# Altium PCB PCB.PcbDoc
Units mm, origin at the board's own origin, x right, y up, seen from the top; angles counter-clockwise.
Board outline 99.04 x 36.09 mm, 2 copper layers (Top Layer, Bottom Layer); 36 components, 25 nets, 101 pads, 18 vias.
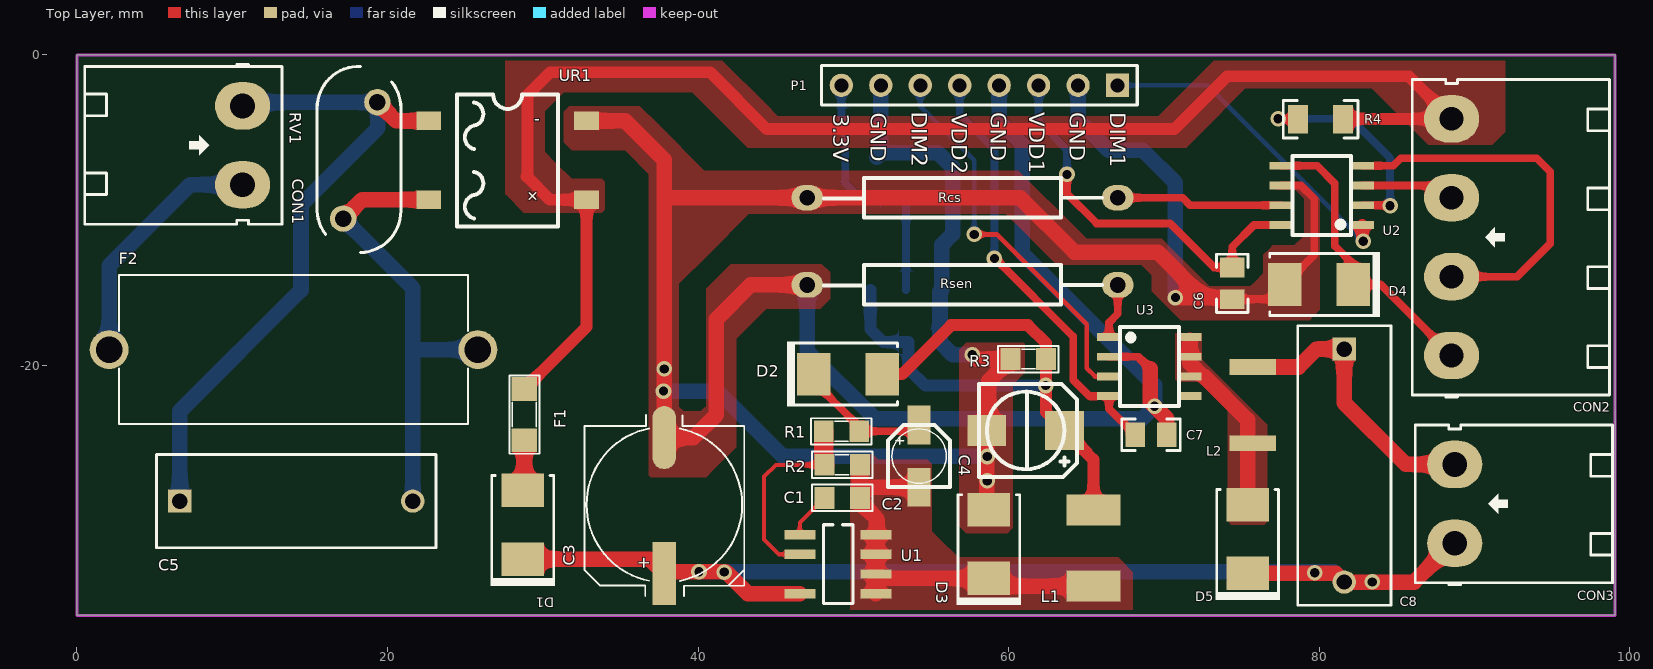
[diagram p0: Top Layer view]
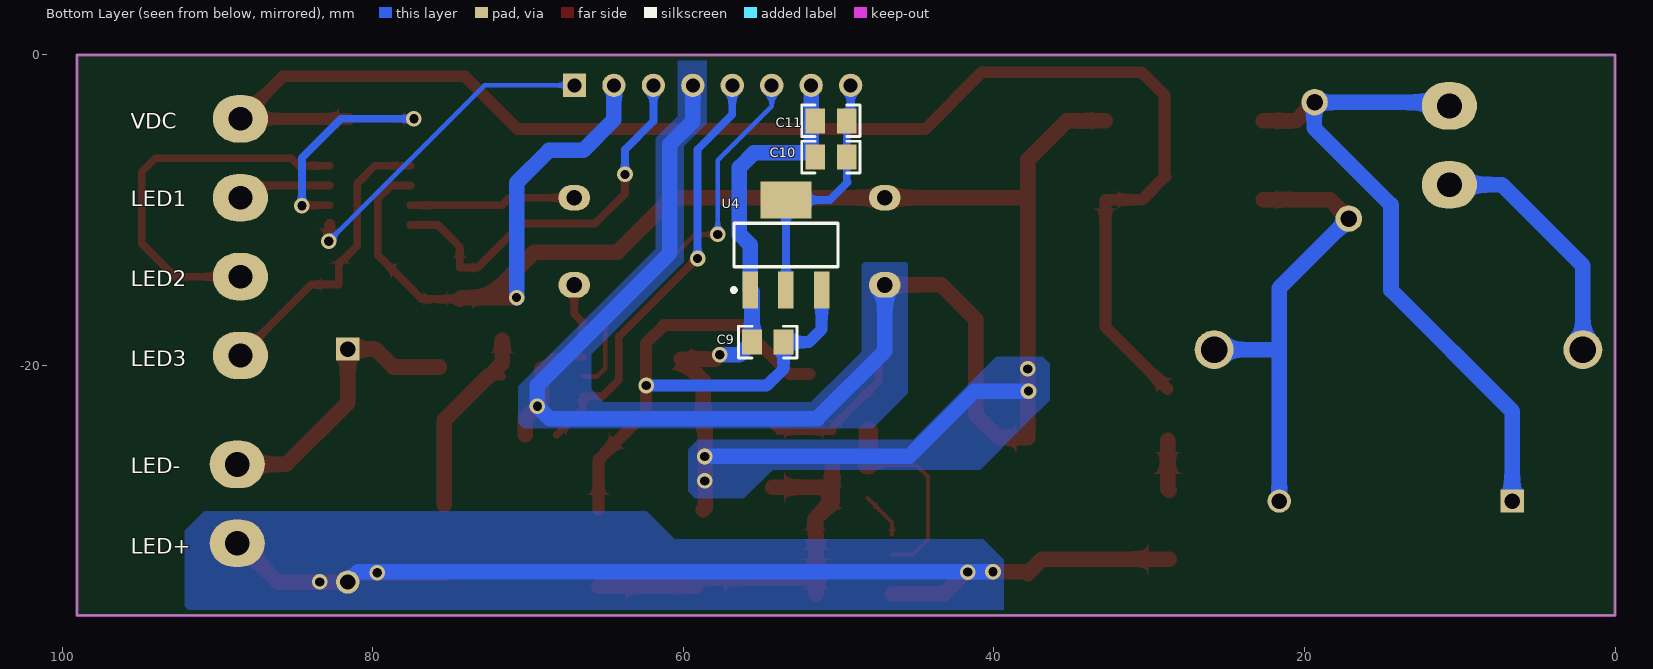
[diagram p1: Bottom Layer view, seen from below]

## Layer stack, top to bottom
Top Solder: solder mask 0.0102, Solder Resist, Dk 3.5
Top Layer: signal copper 0.0356
Dielectric 1: dielectric 0.32, FR-4, Dk 4.8
Bottom Layer: signal copper 0.0356
Bottom Solder: solder mask 0.0102, Solder Resist, Dk 3.5

## Board outline
0,-36.093 99.045,-36.093 99.045,0 0,0

## Design rules (kind name [scope] priority, off if disabled: settings)
Clearance [All] p1: gap=0.254
MinimumSolderMaskSliver [All] p1: minsoldermaskwidth=0
PolygonConnect [All] p1: connectstyle=Direct reliefconductorwidth=0.254 reliefentries=4 polygonreliefangle="90 Angle" airgapwidth=0.254
RoutingVias [All] p1: holewidth=0.4 width=0.7 viastyle="Through Hole" minholewidth=0.3 minwidth=0.6 maxholewidth=2 maxwidth=5
SilkToBoardRegionClearance [All] p1 off:
SilkToSolderMaskClearance [IsPad] p1: minsilkscreentomaskgap=0 clearancetoexposedcopper=TRUE
SolderMaskExpansion [All] p1: expansion=0.102
Width [All] p1: maxlimit=2.54 minlimit=0.254 preferedwidth=0.508
27 further rules are at their usual default settings.

## Components (designator, comment, footprint, x,y, rotation, side; value= is the part's Value field where it differs from the comment)
C1 "104" 0805_Cap 49.276,-28.524 r180 top
C2 "10uF" TU_NHOM_10uF_MH 54.229,-25.832 r180 top
C3 "400AX6R8M8x11" CAP-PANACAP-G-GENERIC 37.821,-28.956 r90 top locked
C4 "220uF" TU_NHOM_2.5_MH 61.087,-24.181 r270 top
C5 "B32922C3334M189" B32922_12mm 14.122,-28.727 r0 top locked
C6 "104" 0805_HV 74.397,-14.707 r90 top
C7 "104" 0805_HV 69.164,-24.46 r180 top
C8 "B32922C3334M189" B32922_12mm 81.61,-26.441 r270 top locked
C9 "105" 0805_HV 54.559,-18.491 r180 bottom
C10 "105" 0805_HV 50.495,-6.579 r180 bottom
C11 "105" 0805_HV 50.495,-4.242 r180 bottom
CON1 "CON 2 EDG 5.08_MH" "CON 2 EDG 5.08" 10.668,-5.817 r270 top locked
CON2 "CON 4 EDG 5.08_MH" "Con 4 EDG 5.08" 88.519,-11.735 r90 top locked
CON3 "CON 2 EDG 5.08_MH" "CON 2 EDG 5.08" 88.722,-28.905 r90 top
D1 "US1M-13-F" SMB 28.702,-30.251 r270 top
D2 "US1M-13-F" SMB 49.657,-20.549 r180 top
D3 "US1M-13-F" SMB 58.725,-31.496 r270 top
D4 "US1M-13-F" SMB 79.984,-14.783 r0 top
D5 "US1M-13-F" SMB 75.387,-31.166 r270 top
F1 "FUSE_AUTO_0.5A 8V 1206_MH" "FUSE 1206" 28.78,-23.114 r270 top
F2 "37015000430" "Fuse 5x20" 13.945,-18.974 r180 top locked
L1 "680uF" "Inductor 4.5x5"#1 65.557,-32.004 r270 top
L2 "680uF" "Inductor 4.5x5"#2 75.817,-22.794 r270 top
P1 "Header 8" HDR1X8 67.005,-1.956 r180 top
R1 "13k" 0805_R 49.225,-24.232 r0 top
R2 "2K" 0805_R 49.276,-26.391 r180 top
R3 "3k3" 0805_R 61.265,-19.583 r0 top
R4 "2K" 1206 80.086,-4.14 r180 top
Rcs "TRO_CS_2W_MH" TRO_VACH_2W 57.023,-9.195 r0 top locked
Rsen "TRO_CS_2W_MH" TRO_VACH_2W 57.023,-14.808 r0 top locked
RV1 "S10K275E2" VAR_S10K275E2 18.161,-6.731 r270 top
U1 "LNK306" "SOP 7" 48.997,-32.791 r0 top
U2 "FL77905MX" "SOP 8" 80.162,-9.042 r90 top
U3 "HV9925SG" "SOP 8" 69.063,-20.066 r270 top
U4 "AMS1117-3.3V SOT223 _MH" SOT223 53.391,-12.238 r180 bottom locked
UR1 "DB207S" DB207S 27.737,-6.782 r270 top locked

## Footprints (in the part's own frame and the unit in brackets; to place one, negate y for a bottom-side part, rotate by r counter-clockwise, add the part's x,y. Pads: shape width x height; smd on the part's side, far side on the other; paste and mask are expansions set on the pad)
0805_Cap [mil]
  rect 50x55 smd: 1(-45,0) 2(45,0)
  silkscreen extent -77,-34 76,33, body extent -57,-25 53,25, height 32
0805_HV [mil] "0805 with 30mil clearance between pads"
  rect 50x63 smd: 1(-40,0) 2(40,0)
  silkscreen extent -74,-40 74,40, body extent -43,-29 43,29, height 57
0805_R [mil]
  rect 50x55 smd: 1(-45,0) 2(45,0)
  silkscreen extent -77,-34 76,33, body extent -45,-27 45,27, height 28
1206 [mm] "1206 from SM-752 data"
  rect 1.3x1.85 smd: 1(1.45,0) 2(-1.45,0)
  silkscreen extent -2.4,-1.21 2.4,1.21, body extent -1.7,-0.9 1.7,0.9, height 1.35
B32922_12mm [mm] "Epcos film capacitors, 15mm spacing"
  rect 1.5x1.5 hole 0.991: 1(-7.5,0)
  round 1.5 hole 0.991: 2(7.5,0)
  silkscreen extent -9,-3 9,3, body extent -9,-3 9,3, height 12
CAP-PANACAP-G-GENERIC [mil]
  rect 160x59.06 smd: 1(-175,0)
  oval 160x59.06 smd: 2(170,0)
  silkscreen extent -231,-203 227,203, body extent -233,-203 223,203, height 402
"CON 2 EDG 5.08" [mil]
  oval 120x140 hole 62.99: 1(-100,0) 2(100,0)
  silkscreen extent -205,-400 200,100, body extent -197,-399 197,73, height 334
"Con 4 EDG 5.08" [mil]
  oval 120x140 hole 60: 1(-300,0) 2(-100,0) 3(100,0) 4(300,0)
  silkscreen extent -405,-400 400,100, body extent -396,-402 397,70, height 334
DB207S [mm]
  rect 1.2x1.6 smd: 1(-2.54,-5.08) 2(2.54,-5.08) 3(2.54,5.08) 4(-2.54,5.08)
  silkscreen extent -4.25,-3.25 4.26,3.25, body extent -4.4,-4.98 4.4,4.98, height 3.02
"Fuse 5x20" [mm] "Epcos film capacitors, 15mm spacing"
  round 2.5 hole 1.7: 1(-11.875,0) 2(11.875,0)
  silkscreen extent -11.25,-4.8 11.25,4.8, body extent -12.14,-4.46 12.11,4.54, height 13.94
"FUSE 1206" [mil]
  rect 60x65 smd: 1(-63,0.94) 2(67,0.94)
  silkscreen extent -97,-37 101,40, body extent -63,-33 63,33, height 22
HDR1X8 [mm] "Connector; Header; 8 Position"
  rect 1.5x1.5 hole 0.9: 1(0,0)
  round 1.5 hole 0.9: 2(2.54,0) 3(5.08,0) 4(7.62,0) 5(10.16,0) 6(12.7,0) 7(15.24,0) 8(17.78,0)
  silkscreen extent -1.27,-1.27 19.05,1.27
"Inductor 4.5x5"#1 [mm]
  rect 2x3.5 smd: 1(2.2,-0.1) 2(-2.7,-0.1)
  body extent -2.6,-2.6 2.2,2.2, height 2
"Inductor 4.5x5"#2 [mm]
  rect 1x3 smd: 1(2.2,-0.1) 2(-2.7,-0.1)
  body extent -2.6,-2.6 2.2,2.2, height 2
SMB [mm] "Molded Diode, 2-Leads, Body 5.4x3.6mm, IPC Medium Density, based on OnSemi component dimensions"
  rect 2.159x2.743 smd: 1(2.21,0) 2(-2.21,0)
  silkscreen extent -3.18,-2.08 3.94,2.08, body extent -2.7,-1.8 2.7,1.8, height 2.32
"SOP 7" [mm]
  rect 2x0.6 smd: 1(-2.45,1.905) 2(-2.45,0.635) 4(-2.45,-1.905) 5(2.45,-1.905) 6(2.45,-0.635) 7(2.45,0.635) 8(2.45,1.905)
  silkscreen extent -0.93,-2.54 0.98,2.54, body extent -3.02,-2.42 3.02,2.48, height 1.36
"SOP 8" [mil] "LQFP64"
  rect 20x60 smd: 1(-75,-102.5) 2(-25,-102.5) 3(25,-102.5) 4(75,-102.5) 5(75,102.5) 6(25,102.5) 7(-25,102.5) 8(-75,102.5)
  silkscreen extent -100,-74 100,74, body extent -98,-120 100,117, height 63
SOT223 [mm]
  rect 1x2.4 smd: 1(-2.3,-2.9) 2(0,-2.9) 3(2.3,-2.9)
  rect 3.3x2.4 smd: 4(0,2.9)
  silkscreen extent -3.48,-3.02 3.35,1.4, body extent -3.25,-3.56 3.25,3.4, height 1.68
TRO_VACH_2W [mil]
  oval 80x65 hole 40: 1(-393.7,0) 2(393.7,0)
  silkscreen extent -351,-50 354,50, body extent -414,-110 414,107, height 217
TU_NHOM_2.5_MH [mm]
  rect 2.5x2.5 smd: 1(0,2.5)
  rect 2x2.5 smd: 2(0,-2.5)
  silkscreen extent -3,-3 3,3.3, body extent -3.3,-3.5 3.3,3.5, height 8.11
TU_NHOM_10uF_MH [mm]
  rect 1.5x2.5 smd: 1(0,-2) 2(0,2)
  silkscreen extent -2,-2 2,2, body extent -2.15,-2.5 2.15,2.5, height 5.4
VAR_S10K275E2 [mm] "EPCOS"
  round 1.7 hole 1.067: 1(3.81,-1.016) 2(-3.69,1.184)
  silkscreen extent -6,-2.7 6,2.7, body extent -5.98,-2.7 6.02,2.7, height 15

## Part data
C1 C6 C7 C9 C10 C11: library part CM, "Cap SMD"
C2: library part TU_NHOM_10uF_25V_MH, "TU_NHOM_10uF_25V_MH"
C3: "CAP, AL, 6.8uF, 400V, +/-20%, TH"
C4: library part TU_NHOM_220uF_25V_MH, "TU_NHOM_220uF_25V_MH"
C5 C8: library part BFC233620154, "CAP FILM 0.33UF 630VDC RADIAL"
CON1 CON3: "CON 2 EDG 5.08 (xanh cong)"
CON2: "CON 4 EDG 5.08 (xanh cong)"
D1 D2 D3 D4 D5: library part MURS160-13-F, "Diode, Ultrafast, 600V, 1A, SMB"
F1: "Fuse"
F2: library part 0216008.MXESPP, "FUSE BOARD MOUNT 5A 250VAC RAD"
L1 L2: library part "Inductor 4.5x5_MH"
P1: "Header, 8-Pin"
R1 R2 R3 R4: library part R, "Resistor 1/4W"
RV1: "Varistor 275V RMS 10MM Radial, TH"
U1: library part Component_1
U2: library part FL77905
U3: library part HV9925

## Via types
v1: diameter 1, hole 0.6, Top Layer to Bottom Layer, tented both sides, 18 vias

## Nets (pads, with @x,y where several pads share a name; then routed paths per layer and width w, separated by ;. In a path a pad name is that pad's centre, name@x,y a point inside that pad or via, vN(x,y) a via of type N, cw(c..) or ccw(c..) an arc to the next point about the centre after c; other vN are vias at no path point)
3.3V: C10.2 C11.2 P1.8 U4.2 U4.4 | length 16.6
  Bottom Layer w0.5: P1.8 49.225,-3.988 C11.2 49.479,-8.153 49.428,-8.204 50.563,-9.338 U4.4 U4.2
+15V: C4.1 C9.2 D2.2 L1.2 R3.2 U4.3 | length 40.6
  Top Layer w0.762: D2.2 53.137,-20.549 56.286,-17.399 61.239,-17.399 62.408,-18.567 R3.2 62.408,-23.002 C4.1 65.457,-26.051 L1.2
  Bottom Layer w0.762: U4.3 51.091,-17.664 51.918,-18.491 C9.2 53.543,-20.193 54.635,-21.285 v1(62.382,-21.285)
+VDC: CON2.4 F1.1 R4.2 UR1.3 | length 94.8
  Top Layer w0.762: F1.1 32.817,-17.501 UR1.3 30.455,-9.322 28.956,-7.823 29.007,-7.772 29.007,-2.591 30.48,-1.118 40.767,-1.118 44.425,-4.775 70.663,-4.775 74.066,-1.372 85.776,-1.372 CON2.4 81.562,-4.115 R4.2
+VDC1: C3.1 C8.2 CON3.1 D1.1 D5.1 U1.4 | length 75.3
  Top Layer w1: D1.1 36.881,-32.461 C3.1 37.948,-33.274 v1(40.056,-33.274) 41.783,-33.274 43.205,-34.696 U1.4 ; D5.1 81.044,-33.376 C8.2 86.099,-33.941 88.595,-31.445 CON3.1
  Bottom Layer w1: v1(40.056,-33.274) 79.705,-33.274 80.943,-33.274 C8.2
  other v1: 83.414,-33.934 79.705,-33.35 41.681,-33.299
BP: C1.2 U1.1 | length 3
  Top Layer w0.254: U1.1 46.547,-30.111 C1.2
DIM1: P1.1 U2.1 | length 21
  Top Layer w0.762: U2.1 82.766,-11.925 v1(82.829,-11.989)
  Bottom Layer w0.3: P1.1 72.796,-1.956 v1(82.829,-11.989)
DIM2: P1.6 U3.3 | length 25.2
  Top Layer w0.3: v1(57.785,-11.557) 59.233,-11.557 65.024,-17.348 65.024,-20.168 65.557,-20.701 U3.3
  Bottom Layer w0.3: P1.6 54.305,-3.302 57.785,-6.782 v1(57.785,-11.557)
FB: R1.1 R2.2 U1.2 | length 13.1
  Top Layer w0.254: U1.2 45.212,-32.156 44.247,-31.191 44.247,-27.153 45.009,-26.391 R2.2
  Top Layer w1.27: R1.1 48.082,-26.34 R2.2
GND: C3.2 C4.2 C6.1 C7.1 C9.1 C10.1 C11.1 D3.2 D4.2 P1.2 P1.4 P1.7 R3.1 Rcs.1 Rsen.1 U2.6 U3.2 U4.1 UR1.4 | length 232.6
  Top Layer w0.5: U3.2 68.326,-19.431 69.113,-20.218 ; C6.1 76.835,-15.723 D4.2 79.68,-12.877 79.68,-9.271 78.816,-8.407 U2.6
  Top Layer w1: UR1.4 35.306,-4.242 37.821,-6.756 37.821,-9.093 ; Rsen.1 43.383,-14.808 41.173,-17.018 41.173,-23.165 39.7,-24.638 C3.2 v1(37.821,-20.218) 37.821,-9.093 ; v1(57.658,-19.304) 57.937,-19.583 R3.1 58.725,-20.98 58.725,-24.043 C4.2 58.587,-29.148 D3.2 ; 69.113,-20.218 69.113,-22.352 v1(69.393,-22.631) 70.18,-23.419 C7.1 ; v1(70.739,-15.621) 72.517,-15.621 ; C6.1 74.295,-15.621 72.517,-15.621 ; 37.821,-9.093 37.922,-9.195 Rcs.1 60.731,-9.195 64.237,-12.7 69.596,-12.7 72.517,-15.621
  Bottom Layer w1: v1(37.77,-21.641) 41.25,-21.641 45.441,-25.832 58.598,-25.832 v1(58.623,-25.857) ; Rsen.1 47.023,-19.058 51.384,-23.419 68.605,-23.419 v1(69.393,-22.631) 69.393,-21.285 60.858,-12.751 60.858,-5.74 59.385,-4.267 P1.4 ; C10.1 C10.1@51.765,-6.325 ; P1.7 C10.1@51.765,-6.325 ; v1(57.658,-19.304) 56.388,-19.304 C9.1 55.575,-15.254 U4.1 55.691,-12.229 56.388,-11.532 56.388,-7.239 55.448,-6.299 51.791,-6.299 C10.1@51.765,-6.325 ; P1.2 64.465,-4.166 66.446,-6.147 68.656,-6.147 70.739,-8.23 v1(70.739,-15.621)
  other v1: 58.623,-27.432
L: C5.1 CON1.1 RV1.2 UR1.1 | length 43.6
  Top Layer w1: RV1.2 20.546,-4.242 UR1.1
  Bottom Layer w1: C5.1 6.622,-22.943 14.427,-15.138 14.427,-9.652 19.38,-4.699 19.38,-3.076 RV1.2 ; CON1.1 10.897,-3.048 RV1.2@19.338,-3.048
LED1: CON2.3 U2.3 | length 6.1
  Top Layer w0.5: U2.3 87.732,-8.407 CON2.3
LED2: CON2.2 U2.4 | length 24.5
  Top Layer w0.5: U2.4 84.76,-7.137 85.242,-6.655 94.005,-6.655 94.869,-7.518 94.869,-12.141 92.735,-14.275 CON2.2
LED3: CON2.1 D4.1 U2.5 | length 19.1
  Top Layer w0.5: U2.5 79.858,-7.137 81.001,-8.28 81.001,-12.294 82.194,-13.487 D4.1 83.947,-14.783 CON2.1
LED-: C8.1 CON3.2 L2.2 | length 18.6
  Top Layer w1: L2.2 78.662,-20.094 79.814,-18.941 C8.1 81.61,-22.403 85.573,-26.365 CON3.2
N: C5.2 F2.1 RV1.1 UR1.2 | length 30.3
  Top Layer w1: RV1.1 18.364,-9.322 UR1.2
  Bottom Layer w1: RV1.1 21.622,-15.018 21.622,-19.101 ; C5.2 21.622,-19.101 ; F2.1 21.749,-18.974 21.622,-19.101
NetC2_1: C2.1 D2.1 R1.2 | length 9.6
  Top Layer w0.5: D2.1@47.422,-19.863 47.422,-21.006 50.368,-23.952 R1.2 53.829,-24.232 C2.1
NetCON1_2: CON1.2 F2.2 | length 16.2
  Bottom Layer w1: F2.2 2.07,-13.577 7.29,-8.357 CON1.2
NetD1_2: D1.2 F1.2 | length 3.3
  Top Layer w1: D1.2 28.804,-27.94 F1.2
NetD5_2: D5.2 L2.1 U3.6 U3.7 U3.8 | length 13
  Top Layer w0.5: U3.6 72.517,-20.701 72.593,-20.701
  Top Layer w1: U3.8@71.666,-18.364 U3.7 71.666,-19.85 72.517,-20.701 ; 72.593,-20.701 75.387,-23.495 D5.2
NetR4_1: R4.1 U2.2 | length 14.4
  Top Layer w0.5: v1(77.343,-4.115) 77.368,-4.14 R4.1 ; U2.2 84.531,-9.677 v1(84.557,-9.703)
  Bottom Layer w0.5: v1(77.343,-4.115) 82.042,-4.115 84.557,-6.629 v1(84.557,-9.703)
NetRcs_2: Rcs.2 U2.7 | length 10.7
  Top Layer w0.5: Rcs.2 71.196,-9.195 71.679,-9.677 U2.7
NetRsen_2: Rsen.2 U3.1 | length 3.6
  Top Layer w0.5: U3.1 66.459,-17.234 67.023,-16.67 Rsen.2
S: C1.1 C2.2 D3.1 L1.1 R2.1 U1.5 U1.6 U1.7 U1.8 | length 27.2
  Top Layer w1: R2.1 C1.1 ; U1.5 U1.6 ; C2.2 51.111,-27.832 C1.1 ; L1.1 59.223,-34.204 D3.1 51.726,-33.706 U1.6 ; C1.1 50.419,-28.778 51.511,-29.87 51.511,-30.822 U1.8 U1.7 U1.6
VDD1: C6.2 P1.3 U2.8 | length 25.4
  Top Layer w0.5: v1(63.754,-7.696) 63.754,-8.941 65.659,-10.846 70.383,-10.846 73.228,-13.691 C6.2 74.397,-12.344 75.794,-10.947 U2.8
  Bottom Layer w0.5: P1.3 61.925,-4.267 63.754,-6.096 v1(63.754,-7.696)
VDD2: C7.2 P1.5 U3.4 | length 28
  Top Layer w0.5: v1(59.08,-13.106) 59.131,-13.106 64.16,-18.136 64.16,-20.93 65.202,-21.971 U3.4 66.459,-22.771 C7.2
  Bottom Layer w0.5: P1.5 56.845,-3.835 59.08,-6.071 v1(59.08,-13.106)
pads on no net: U3.5

## Polygon pours and split planes (outlines as drawn)
GND on Top Layer "Bottom Layer-No Net" (solid, pour order 16): 38.735,-21.234 38.735,-22.606 39.065,-22.936 39.624,-22.936 40.183,-22.936 40.361,-22.758 40.513,-22.606 40.513,-21.412 40.513,-15.062 41.478,-14.097 42.113,-13.462 46.126,-13.462 47.955,-13.462 48.463,-13.97 48.514,-14.021 48.514,-15.519 48.514,-15.697 48.057,-16.154 47.879,-16.332 45.974,-16.332 44.399,-16.332 43.205,-17.526 42.443,-18.288 42.443,-24.333 42.443,-25.248 41.046,-26.645 40.513,-27.178 37.744,-27.178 37.744,-21.158 37.77,-21.133
GND on Top Layer "Bottom Layer-No Net" (solid, pour order 14): 36.83,-27.051 36.83,-7.671 35.408,-6.248 35.281,-6.121 32.969,-6.121 31.852,-6.121 31.521,-5.791 31.344,-5.613 31.344,-4.445 31.344,-3.658 31.496,-3.505 31.699,-3.302 32.588,-3.302 36.246,-3.302 37.389,-4.445 40.386,-7.442 44.196,-7.442 60.63,-7.442 64.491,-11.303 65.024,-11.836 69.113,-11.836 69.85,-11.836 71.755,-13.741 72.923,-14.91 74.524,-14.91 75.565,-14.91 75.87,-14.605 76.403,-14.072 76.403,-13.259 76.403,-12.878 76.81,-12.471 77.013,-12.268 78.156,-12.268 78.384,-12.268 78.892,-11.76 79.045,-11.608 79.045,-10.211 79.045,-9.271 78.74,-8.966 78.435,-8.661 78.003,-8.661 77.216,-8.661 76.987,-8.433 77.089,-8.331 77.089,-8.255 79.019,-8.255 79.35,-8.585 80.035,-9.271 80.035,-15.646 80.035,-16.408 79.604,-16.84 79.375,-17.069 74.397,-17.069 71.069,-17.069 69.494,-15.494 69.215,-15.215 69.215,-14.249 69.215,-14.199 68.732,-13.716 68.529,-13.513 67.64,-13.513 63.094,-13.513 60.071,-10.49 59.817,-10.236 55.524,-10.236 43.256,-10.236 40.64,-12.852 38.76,-14.732 38.76,-25.476 38.76,-27.051 38.633,-27.178 38.481,-27.178 36.957,-27.178 36.83,-27.051
+VDC on Top Layer "Bottom Layer-No Net" (solid, pour order 12): 33.782,-10.16 28.778,-10.16 27.635,-9.017 27.584,-8.966 27.584,-5.512 27.584,-0.025 27.61,0 41.199,0 44.348,-3.15 45.136,-3.937 47.65,-3.937 69.621,-3.937 73.533,-0.025 91.948,-0.025 91.973,0 91.973,-4.953 91.338,-5.588 91.135,-5.791 87.96,-5.791 87.02,-5.791 86.131,-4.902 83.388,-2.159 79.959,-2.159 75.235,-2.159 72.288,-5.105 71.425,-5.969 44.348,-5.969 43.18,-5.969 39.776,-2.565 39.624,-2.413 35.331,-2.413 31.344,-2.413 30.556,-3.2 30.124,-3.632 30.124,-4.293 30.124,-6.248 30.836,-6.96 31.852,-7.976 33.782,-7.976 33.985,-8.179 33.985,-9.957
GND on Top Layer "Bottom Layer-No Net" (solid, pour order 10): 60.96,-18.542 57.252,-18.542 56.896,-18.898 56.82,-18.974 56.82,-21.514 56.82,-30.353 57.226,-30.759 57.252,-30.785 59.207,-30.785 59.944,-30.785 60.173,-30.556 60.249,-30.48 60.249,-29.159 60.249,-21.234 60.96,-20.523 61.036,-20.447 61.036,-18.618
NetD5_2 on Top Layer "Bottom Layer-No Net" (solid, pour order 8): 70.739,-17.907 70.739,-20.777 70.739,-20.879 70.866,-21.006 70.891,-21.031 71.958,-21.031 72.212,-21.031 72.669,-21.488 74.092,-22.911 74.092,-29.058 74.092,-29.997 74.346,-30.251 76.378,-30.251 76.454,-30.251 76.606,-30.099 76.657,-30.048 76.657,-29.235 76.657,-23.825 73.736,-20.904 72.415,-19.583 72.415,-17.907
S on Top Layer "Bottom Layer-No Net" (solid, pour order 2): 49.784,-25.705 49.784,-36.068 49.809,-36.093 67.996,-36.093 67.996,-33.299 67.234,-32.537 67.056,-32.36 59.741,-32.36 56.744,-32.36 55.499,-31.115 55.042,-30.658 55.042,-28.27 55.042,-26.314 54.788,-26.06 52.883,-26.06 51.613,-26.06 51.257,-25.705
GND on Bottom Layer "Bottom Layer-No Net" (solid, pour order 18): 45.542,-13.462 45.542,-20.244 45.542,-21.793 47.219,-23.47 47.803,-24.054 52.68,-24.054 70.282,-24.054 70.536,-23.8 70.637,-23.698 70.637,-22.479 70.637,-21.336 68.58,-19.279 61.773,-12.471 61.773,-6.68 61.773,-5.359 60.452,-4.039 60.35,-3.937 60.35,0 58.496,0 58.496,-2.489 58.496,-4.394 59.563,-5.461 59.969,-5.867 59.969,-8.23 59.969,-13.31 61.011,-14.351 65.938,-19.279 65.938,-21.26 65.938,-21.539 65.176,-22.301 65.1,-22.377 62.84,-22.377 51.791,-22.377 49.479,-20.066 48.514,-19.101 48.514,-15.011 48.514,-13.487 48.489,-13.462 48.362,-13.335 48.235,-13.335 45.644,-13.335 45.542,-13.437
+VDC1 on Bottom Layer "Bottom Layer-No Net" (solid, pour order 6): 39.37,-32.512 39.37,-36.043 39.319,-36.093 91.516,-36.093 92.075,-35.535 92.1,-35.509 92.1,-32.639 92.1,-30.632 91.034,-29.566 90.856,-29.388 88.494,-29.388 62.357,-29.388 61.011,-30.734 60.554,-31.191 55.143,-31.191 40.691,-31.191 39.37,-32.512
GND on Bottom Layer "Bottom Layer-No Net" (solid, pour order 4): 38.481,-19.431 37.186,-19.431 36.855,-19.431 36.652,-19.634 36.398,-19.888 36.398,-20.853 36.398,-22.225 37.998,-23.825 40.869,-26.695 46.457,-26.695 54.254,-26.695 56.109,-28.55 58.953,-28.55 59.258,-28.55 59.665,-28.143 59.69,-28.118 59.69,-25.73 59.69,-25.4 59.309,-25.019 59.055,-24.765 57.785,-24.765 45.187,-24.765 40.792,-20.371 39.853,-19.431 38.506,-19.431

## Keep-outs
Keep-Out Layer:
  the board outline again, w0.203

## Silkscreen, mask and mechanical layers (free items; w line width, h text height)
Top Overlay:
  text "DIM2" at 53.746,-3.658 h1 r270
  text "DIM2" at 53.746,-3.658 h1 r270
  text "GND" at 58.852,-3.683 h1 r270
  text "VDD1" at 61.316,-3.683 h1 r270
  text "GND" at 63.932,-3.683 h1 r270
  text "DIM1" at 66.548,-3.683 h1 r270
  text "GND" at 51.105,-3.708 h1 r270
  text "VDD2" at 56.337,-3.759 h1 r270
  text "3.3V" at 48.717,-3.785 h1 r270
Bottom Overlay:
  text "VDC" at 95.58,-4.75 h1
  text "LED1" at 95.58,-9.754 h1
  text "LED2" at 95.58,-14.884 h1
  text "LED3" at 95.58,-20.041 h1
  text "LED-" at 95.58,-26.924 h1
  text "LED+" at 95.58,-32.131 h1

## Text inside footprints (layer, text, board x,y; h text height)
C3: Top Overlay "+" at 36.846,-33.156 h0.76 r90
UR1: Top Overlay "+" at 28.789,-9.019 h0.76 r315; Top Overlay "-" at 29.454,-4.46 h0.76